# Altium PCB PCB_V1.0.PcbDoc
Units mil, origin at the board's own origin, x right, y up, seen from the top; angles counter-clockwise.
Board outline 2435.03 x 1200.03 mil, 2 copper layers (Top Layer, Bottom Layer), stack 22.441 mil thick; 48 components, 39 nets, 166 pads, 75 vias.
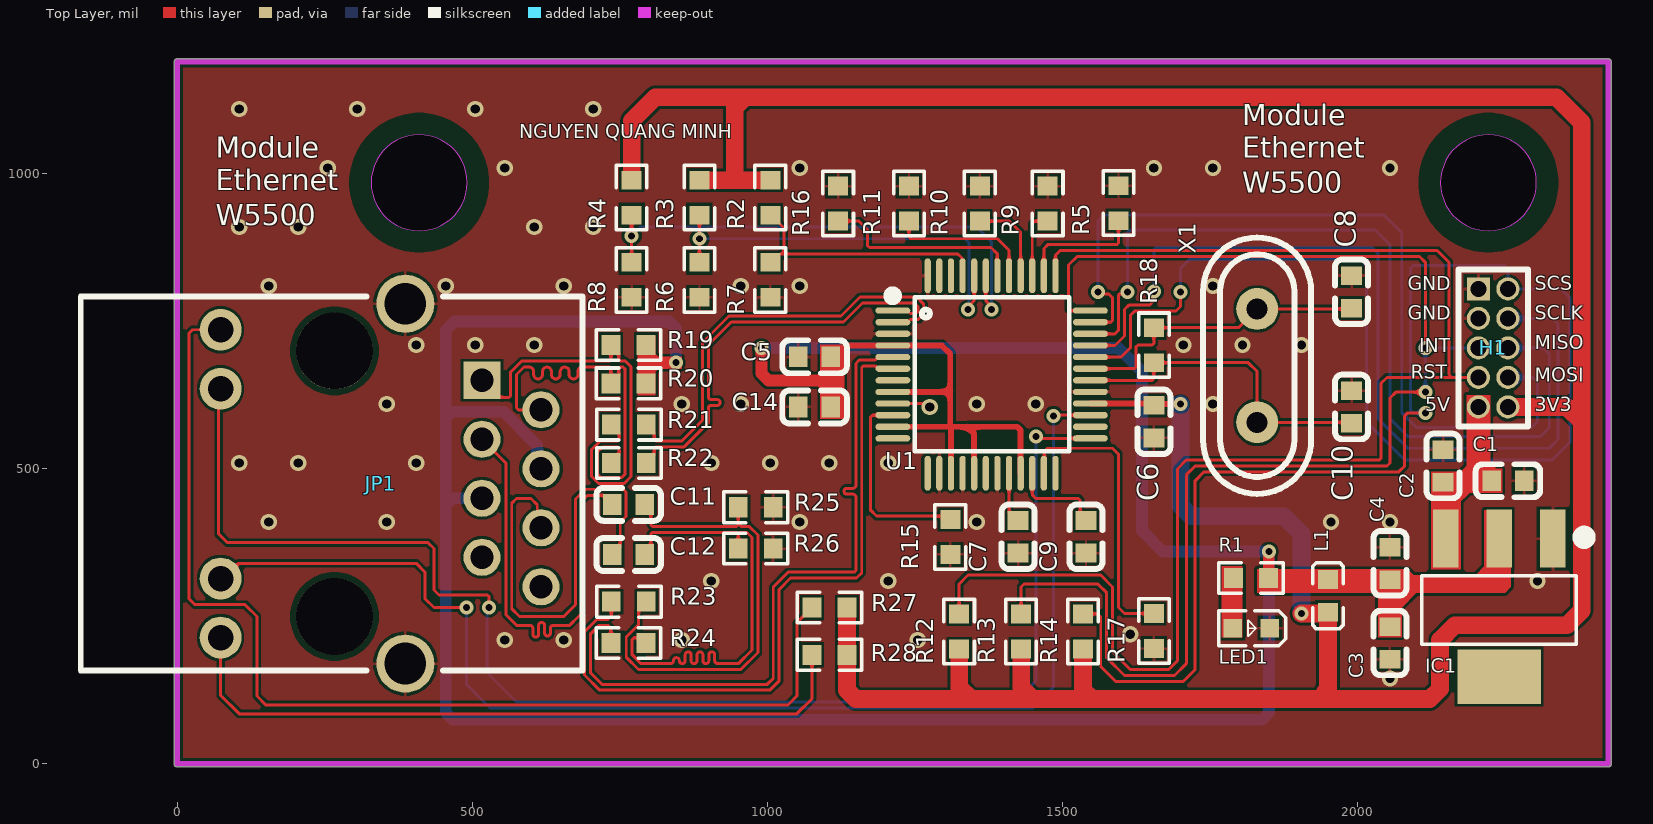
[diagram p0: Top Layer view]
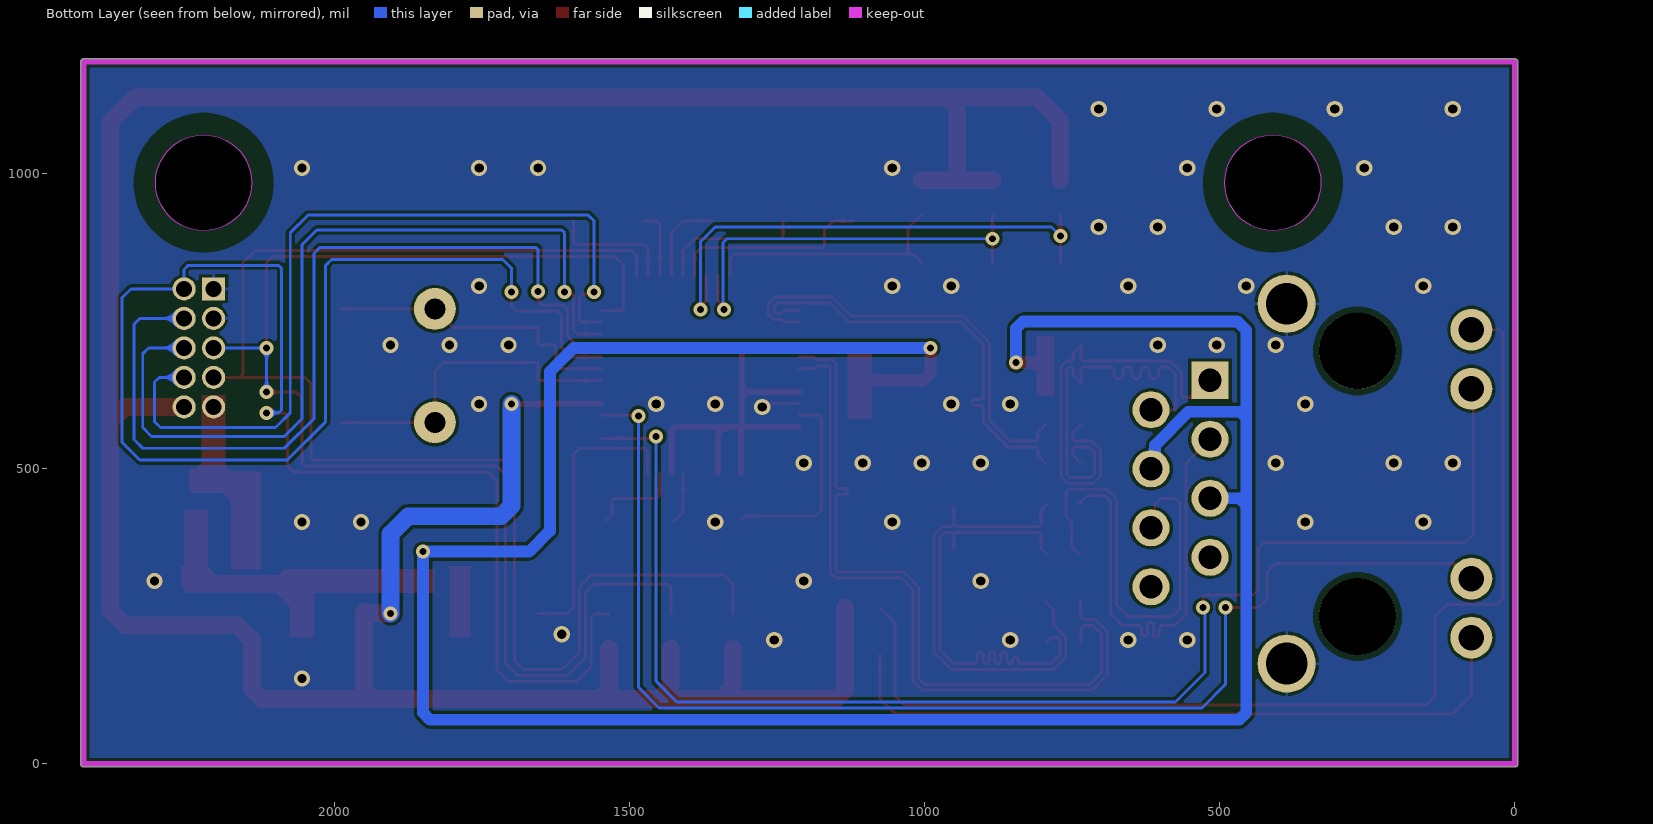
[diagram p1: Bottom Layer view, seen from below]
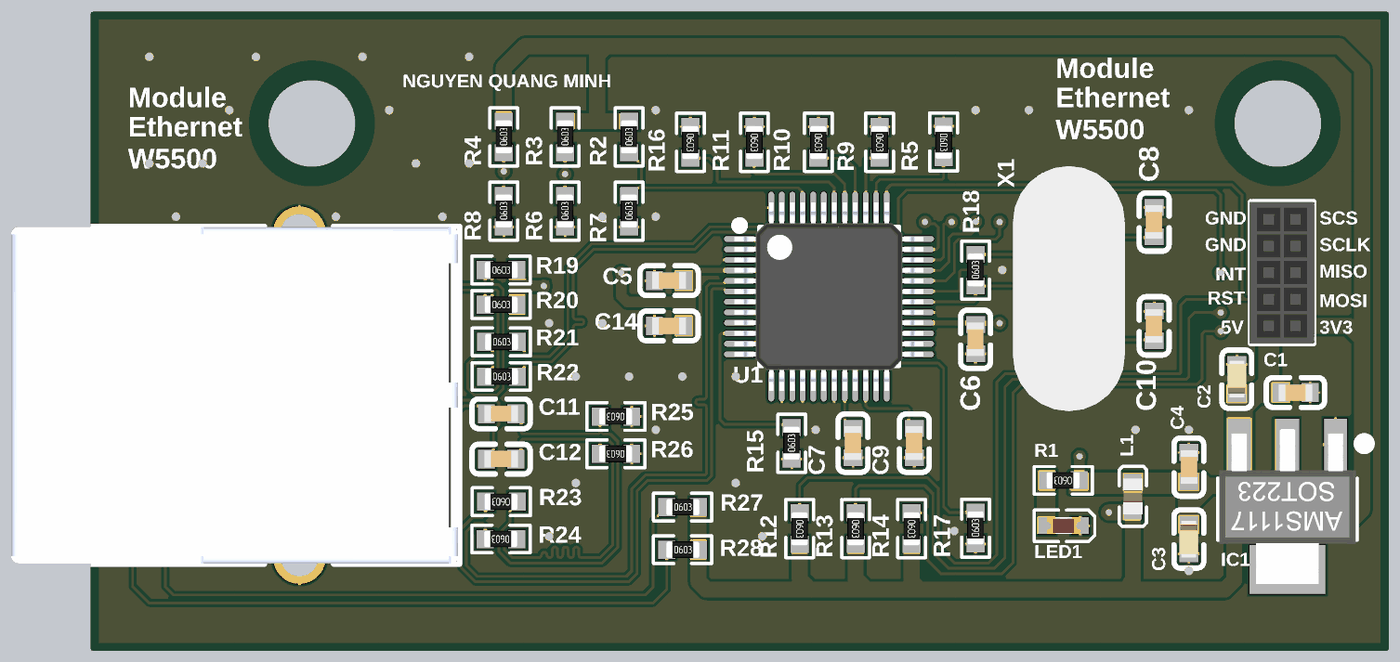
[diagram p2: 3D render of the assembled board from above, using the file's embedded part models]

## Layer stack, top to bottom
Top Solder: solder mask 0.5, Solder Resist, Dk 3.8
Top Layer: signal copper 1.378
Dielectric 1: core 19.685, FR-4, Dk 4.5
Bottom Layer: signal copper 1.378
Bottom Solder: solder mask 0.5, Solder Resist, Dk 3.8

## Board outline
-5.02,0 ccw(c0,0) 0,-5.01 2425,-5.01 ccw(c2425,0) 2430.02,0 2430.02,1190 ccw(c2425,1190) 2425,1195.01 0,1195.01 ccw(c0,1190) -5.02,1190
cut-out: 2140.5,985 ccw(c2221.89,985) 2221.89,903.61 ccw(c2221.89,985) 2303.28,985 ccw(c2221.89,985) 2221.89,1066.39 ccw(c2221.89,985)
cut-out: 328.61,985 ccw(c410,985) 410,903.61 ccw(c410,985) 491.39,985 ccw(c410,985) 410,1066.39 ccw(c410,985)

## Design rules (kind name [scope] priority, off if disabled: settings)
BoardOutlineClearance [All] p1: gap=7.87 ignorepadtopadclearanceinfootprint=FALSE
Clearance [All] p1: gap=5 ignorepadtopadclearanceinfootprint=FALSE except(9.84: Arc-Hole Track-Hole SMDPad-Hole THPad-Hole Via-Hole Fill-Hole Poly-Hole Region-Hole Text-Hole)
ComponentClearance [All] p1: gap=5 collisioncheckmode=3 verticalgap=5 showdistances=TRUE
DiffPairsRouting [All] p1: maxlimit=10 minlimit=5 mostfreqgap=5 toplayer_minwidth=5 toplayer_maxwidth=1000 toplayer_prefwidth=5 bottomlayer_minwidth=5 bottomlayer_maxwidth=1000 bottomlayer_prefwidth=5 maxuncoupledlength=500
Height [All] p1: minheight=0 maxheight=71497.94 prefheight=500
HoleSize [All] p1: absolutevalues=TRUE maxlimit=248.03 minlimit=11.81 maxpercent=80.000 minpercent=20.000
HoleToHoleClearance [All] p1: gap=9.84 allowstackedmicrovias=FALSE
MinimumAnnularRing [All] p1: minimumring=3
MinimumSolderMaskSliver [All] p1: minsoldermaskwidth=0
PlaneClearance [All] p1: clearance=5
PlaneConnect PlaneConnectPowerPads [InPadClass('PowerPads')] p1: planeconnectstyle=Direct reliefexpansion=20 reliefentries=4 reliefconductorwidth=10 reliefairgap=10
PlaneConnect [All] p2: pad.planeconnectstyle=Relief pad.reliefexpansion=11.81 pad.reliefentries=4 pad.reliefconductorwidth=5 pad.reliefairgap=5 via.planeconnectstyle=Direct via.reliefexpansion=11.81 via.reliefentries=4 via.reliefconductorwidth=5 via.reliefairgap=5
PolygonConnect PolygonConnectPowerPads [All vs (InPadClass('PowerPads'))] p1: connectstyle=Direct reliefconductorwidth=10 reliefentries=4 polygonreliefangle="90 Angle" airgapwidth=10
PolygonConnect [All] p2: thpad.connectstyle=Relief thpad.reliefconductorwidth=5 thpad.reliefentries=4 thpad.polygonreliefangle="90 Angle" thpad.airgapwidth=5 smdpad.connectstyle=Relief smdpad.reliefconductorwidth=5 smdpad.reliefentries=4 smdpad.polygonreliefangle="90 Angle" smdpad.airgapwidth=5 via.connectstyle=Direct via.reliefconductorwidth=5 via.reliefentries=4 via.polygonreliefangle="90 Angle" via.airgapwidth=5
RoutingVias [All] p1: holewidth=11.81 width=23.62 viastyle="Through Hole" minholewidth=11.81 minwidth=23.62 maxholewidth=23.62 maxwidth=259.84
SilkToSilkClearance [All] p1: silktosilkclearance=0
SilkToSolderMaskClearance [IsPad] p1: minsilkscreentomaskgap=5 clearancetoexposedcopper=TRUE
SolderMaskExpansion [All] p1: expansion=2.95 istentingtop=FALSE
Width [All] p1: maxlimit=1000 minlimit=5 preferedwidth=5 minimp=50.000000 maximp=50.000000 favimp=50.000000
20 further rules are at their usual default settings.

## Classes and differential pairs
component class VOLTAGE_RESOURCE: C1 C2 C3 C4 C5 C6 IC1 L1 LED1 R1
component class PERIPHERALS: C11 C12 H1 JP1 R19 R20 R21 R22 R23 R24 R25 R26 R27 R28
component class IC: C7 C8 C9 C10 C14 R2 R3 R4 R5 R6 R7 R8 R9 R10 R11 R12 R13 R14 R15 R16 R17 R18 U1 X1
differential pair TD: +TD_P -TD_N
differential pair RD: +RD_P -RD_N
differential pair TX: +TX_P -TX_N
differential pair RX: +RX_P -RX_N

## Components (designator, comment, footprint, x,y, rotation, side; value= is the part's Value field where it differs from the comment)
C1 "100nF" C0603 2255,480 r180 top
C2 "10uF" "C0603 - TANTA" 2145,505 r90 top
C3 "10uF" "C0603 - TANTA" 2055,205 r270 top
C4 "100nF" C0603 2055,340 r270 top
C5 "10pF" C0603 1080,690 r0 top
C6 "10pF" C0603 1655,580 r90 top
C7 "4.7uF" C0603 1425,385 r90 top
C8 "18pF" C0603 1990,800 r90 top
C9 "100nF" C0603 1540,385 r90 top
C10 "18pF" C0603 1990,605 r90 top
C11 "6.8nF" C0603 765,440 r0 top
C12 "6.8nF" C0603 765,355 r0 top
C14 "100nF" C0603 1080,605 r180 top
H1 "2x5P_1.27mm_Female_Header" "2x5P, 1.27mm, Female Header" 2230,705 r270 top
IC1 "AMS1117-3.3" SOT-223 2240,265 r180 top
JP1 "HR911105A, Through Hole" HR911105A 345,475 r270 top
L1 "1uH 330mA" L_0603 1950,285 r270 top
LED1 "Red" LED0603_RED 1820,230 r0 top
R1 "330Ω" R0603 1874.19,341.01 r180 top
R2 "10kΩ" R0603 1031.01,905.12 r90 top
R3 "10kΩ" R0603 911.01,905.12 r90 top
R4 "10kΩ" R0603 796.01,905.12 r90 top
R5 "4.7kΩ" R0603 1568.99,1004.88 r270 top
R6 "10kΩ" R0603 911.01,765.81 r90 top
R7 "10kΩ" R0603 1031.01,765.81 r90 top
R8 "10kΩ" R0603 796.01,765.81 r90 top
R9 "4.7kΩ" R0603 1448.99,1004.19 r270 top
R10 "4.7kΩ" R0603 1333.99,1004.19 r270 top
R11 "4.7kΩ" R0603 1213.99,1004.19 r270 top
R12 "4.7kΩ" R0603 1298.99,279.19 r270 top
R13 "4.7kΩ" R0603 1403.99,279.19 r270 top
R14 "4.7kΩ" R0603 1508.99,279.19 r270 top
R15 "12.4kΩ" R0603 1336.01,330.12 r90 top
R16 "4.7kΩ" R0603 1093.99,1004.19 r270 top
R17 "10kΩ" R0603 1681.01,170.81 r90 top
R18 "1MΩ" R0603 1681.01,655.12 r90 top
R19 "49.9kΩ" R0603 710.12,683.99 r0 top
R20 "49.9kΩ" R0603 710.12,618.99 r0 top
R21 "3.3Ω" R0603 710.81,548.99 r0 top
R22 "3.3Ω" R0603 710.81,483.99 r0 top
R23 "3.3Ω" R0603 819.88,301.01 r180 top
R24 "3.3Ω" R0603 819.19,231.01 r180 top
R25 "49.9kΩ" R0603 1034.88,461.01 r180 top
R26 "49.9kΩ" R0603 1034.88,391.01 r180 top
R27 "330Ω" R0603 1050.81,238.99 r0 top
R28 "330Ω" R0603 1050.81,158.99 r0 top
U1 "W5500_48LQFP" "48LQFP (7*7)" 1380,660 r270 top
X1 "25MHz" HC-49S 1830,675 r90 top

## Footprints (in the part's own frame and the unit in brackets; to place one, negate y for a bottom-side part, rotate by r counter-clockwise, add the part's x,y. Pads: shape width x height; smd on the part's side, far side on the other; paste and mask are expansions set on the pad)
"2x5P, 1.27mm, Female Header" [mm]
  rect 1x1 hole 0.7 paste-2539.97 mask+0.051: 1(-2.54,-0.635)
  round 1 hole 0.7 paste-2539.97 mask+0.051: 2(-2.54,0.635) 3(-1.27,-0.635) 4(-1.27,0.635) 5(0,-0.635) 6(0,0.635) 7(1.27,-0.635) 8(1.27,0.635) 9(2.54,-0.635) 10(2.54,0.635)
  silkscreen extent -3.38,-1.5 3.38,1.5, body extent -3.37,-1.55 3.37,1.55, height 4.5
"48LQFP (7*7)" [mm]
  oval 0.27x1.5 smd paste+0 mask+0.05: 1(-2.75,-4.25) 2(-2.25,-4.25) 3(-1.75,-4.25) 4(-1.25,-4.25) 5(-0.75,-4.25) 6(-0.25,-4.25) 7(0.25,-4.25) 8(0.75,-4.25) 9(1.25,-4.25) 10(1.75,-4.25) 11(2.25,-4.25) 12(2.75,-4.25) 25(2.75,4.25) 26(2.25,4.25) 27(1.75,4.25) 28(1.25,4.25) 29(0.75,4.25) 30(0.25,4.25) 31(-0.25,4.25) 32(-0.75,4.25) 33(-1.25,4.25) 34(-1.75,4.25) 35(-2.25,4.25) 36(-2.75,4.25)
  oval 1.5x0.27 smd paste+0 mask+0.05: 13(4.25,-2.75) 14(4.25,-2.25) 15(4.25,-1.75) 16(4.25,-1.25) 17(4.25,-0.75) 18(4.25,-0.25) 19(4.25,0.25) 20(4.25,0.75) 21(4.25,1.25) 22(4.25,1.75) 23(4.25,2.25) 24(4.25,2.75) 37(-4.25,2.75) 38(-4.25,2.25) 39(-4.25,1.75) 40(-4.25,1.25) 41(-4.25,0.75) 42(-4.25,0.25) 43(-4.25,-0.25) 44(-4.25,-0.75) 45(-4.25,-1.25) 46(-4.25,-1.75) 47(-4.25,-2.25) 48(-4.25,-2.75)
  silkscreen extent -3.59,-4.46 3.3,3.34, body extent -4.5,-4.5 4.5,4.5, height 1.6
C0603 [mm]
  rect 0.8x0.9 smd paste+0 mask+0.051: 1(-0.7,0) 2(0.7,0)
  silkscreen extent -1.39,-0.71 1.39,0.71, body extent -0.8,-0.39 0.8,0.41, height 0.8
"C0603 - TANTA" [mm]
  rect 0.8x0.9 smd paste+0 mask+0.051: 1(-0.7,0) 2(0.7,0)
  silkscreen extent -1.39,-0.71 1.39,0.71, body extent -0.88,-0.44 0.88,0.44, height 0.94
HC-49S [mm]
  round 1.8 hole 0.9 paste+0 mask+0.051: 1(-2.44,0) 2(2.44,0)
  silkscreen extent -5.52,-2.32 5.52,2.33, body extent -5.83,-2.67 5.83,2.67, height 3.99
HR911105A [mm] "CONN MOD JACK RJ45 TH"
  rect 1.6x1.6 hole 1 paste-2539.97 mask+0.051: 1(-4.45,4.355)
  round 1.6 hole 1 paste-2539.97 mask+0.051: 2(-3.18,6.895) 3(-1.91,4.355) 4(-0.64,6.895) 5(0.63,4.355) 6(1.9,6.895) 7(3.17,4.355) 8(4.44,6.895)
  round 1.8 hole 1.1 paste-2539.97 mask+0.051: 9(-6.625,-6.895) 10(-4.085,-6.895) 11(4.085,-6.895) 12(6.625,-6.895)
  round 2.5 hole 1.8 paste-2539.97 mask+0.051: SH1(-7.745,1.055) SH2(7.745,1.055)
  round 3.3 hole 3.3 unplated paste-2539.97: ""(-5.715,-1.995) ""(5.715,-1.995)
  silkscreen extent -8.05,-12.91 8.05,8.68, body extent -8.02,-12.68 8.02,8.62, height 13.5
L_0603 [mm]
  rect 0.8x0.864 smd mask+0.051: 1(-0.7,0) 2(0.7,0)
  silkscreen extent -1.42,-0.65 1.42,0.65, body extent -0.85,-0.46 0.85,0.46, height 0.71
LED0603_RED [mm]
  rect 0.8x0.8 smd paste+0 mask+0.051: 1(-0.799,0) 2(0.799,0)
  silkscreen extent -1.39,-0.76 1.49,0.75, body extent -0.8,-0.4 0.8,0.4, height 0.6
R0603 [mil]
  rect 31.75x34.02 smd paste+0 mask+2: 1(24.88,26.01) 2(84.19,26.01)
  silkscreen extent 0,0 109,52, body extent 24,10 86,42, height 18
SOT-223 [mm]
  rect 1.1x2.5 smd paste+0 mask+0.051: 1(-2.3,-2.97) 2(0,-2.97) 3(2.3,-2.97)
  rect 3.6x2.34 smd paste+0 mask+0.051: 4(0,2.97)
  silkscreen extent -3.91,-3.28 3.33,1.57, body extent -3.25,-3.71 3.25,3.66, height 2

## Part data
C1 C4 C9 C14: library part C0603_MLCC_100nF_X7R_50V, "50V 100nF X7R ±10% 0603 Multilayer Ceramic Capacitors MLCC - SMD/SMT ROHS", LCSC Part=C14663, Manufacturer=YAGEO, Mfr. Part=CC0603KRX7R9BB104, Package=0603, Temperature Coefficient="X7R, 50V", Tolerance=±10%, Voltage Rating=50V, Capacitance=100nF, Link=https://www.lcsc.com/product-detail/C14663.html
C2 C3: library part C0603_TANTA_10uF_6.3V, "10uF ±20% 6.3V Tantalum Capacitors 10Ω@100kHz 0603", Equivalent Series Resistance(ESR)=10H@100kHz, LCSC Part=C1953982, Manufacturer=VISHAY, Mfr. Part=TMCJ0J106MTRF, Operating Temperature=-55℃~+125℃, Package=0603, Tolerance=±20%, Voltage Rating=6.3V, Capacitance=10uF, Link=https://www.lcsc.com/product-detail/C1953982.html
C5 C6: library part C0603_MLCC_10pF_NP0_50V, "50V 10pF NP0 ±5% 0603 Multilayer Ceramic Capacitors MLCC - SMD/SMT ROHS", LCSC Part=C106245, Manufacturer=YAGEO, Mfr. Part=CC0603JRNPO9BN100, Package=0603, Temperature Coefficient="NP0, 50V", Tolerance=±5%, Voltage Rating=50V, Capacitance=10pF, Link=https://www.lcsc.com/product-detail/C106245.html
C7: library part C0603_MLCC_4.7uF_X5R_16V, "4.7uF ±10% 16V Ceramic Capacitor X5R 0603", LCSC Part=C19666, Manufacturer="Samsung Electro-Mechanics", Mfr. Part=CL10A475KO8NNNC, Package=0603, Temperature Coefficient="X5R, 16V", Tolerance=±10%, Voltage Rating=16V, Capacitance=4.7uF, Link=https://www.lcsc.com/product-detail/C19666.html
C8 C10: library part C0603_MLCC_18pF_NP0_50V, "18pF ±5% 50V Ceramic Capacitor NP0 0603", LCSC Part=C107040, Manufacturer=YAGEO, Mfr. Part=CC0603JRNPO9BN180, Package=0603, Temperature Coefficient="NP0, 50V", Tolerance=±5%, Voltage Rating=50V, Capacitance=18pF, Link=https://www.lcsc.com/product-detail/C107040.html
C11 C12: library part C0603_MLCC_6.8nF_X7R_50V, "6.8nF ±10% 50V Ceramic Capacitor X7R 0603", LCSC Part=C107097, Manufacturer=YAGEO, Mfr. Part=CC0603KRX7R9BB682, Package=0603, Temperature Coefficient="X7R, 50V", Tolerance=±10%, Voltage Rating=50V, Capacitance=6.8nF, Link=https://www.lcsc.com/product-detail/C107097.html
H1: "Female Header 10 Position 1.27mm Pitch Dual Row Through Hole -40℃~+105℃", LCSC Part=C7499360, Manufacturer=Megastar, Mfr. Part=ZX-PM1.27-2-5PU, Package="Through Hole,P=1.27mm", Holes Structure=2x5P, Key Attributes="CONN SOCKET 10POS 1.27mm DUAL ROW TH", Link=https://www.lcsc.com/product-detail/C7499360.html
IC1: library part AMS1117-3.3_SOT-223, "72dB@(120Hz) 1A Fixed 3.3V Positive 16V SOT-223 Voltage Regulators - Linear, Low Drop Out (LDO) Regulators ROHS", LCSC Part=C6186, Manufacturer="Advanced Monolithic Systems", Operating Temperature=-40℃~+125℃, Output Current=1A, Output Voltage=3.3V, Package=SOT-223, Voltage - Supply=16V, Voltage Dropout=1.1V@(800mA), Category="Power Management (PMIC)/Voltage Regulators - Linear, Low Drop Out (LDO) Regulators", Link=https://www.lcsc.com/product-detail/C6186.html?s_z=n_AMS1117-3.3, Mfr. Part=AMS1117-3.3, Number of Outputs=1, Output Configuration=Positive
JP1: library part HR911105A, "CONN MOD JACK RJ45 TH", LCSC Part=C12074, Manufacturer="HANRUN(Zhongshan HanRun Elec)", Package="Through Hole", Link=https://www.lcsc.com/product-detail/C12074.html, Mfr. Part=HR911105A
L1: library part L_1uH_0603_330mA, "330mA 1uH ±10% 810mΩ Wire-wound chip inductor 0603 Fixed Inductors RoHS", Current=330mA, Inductor=1uH, LCSC Part=C6364703, Manufacture Part Number=AHW1608F-1R0KTF, Manufacturer=APV, Package=0603, Link=https://www.lcsc.com/product-detail/C6364703.html
LED1: library part LED0603_Red, "20mA 230mcd Water Clear -40℃~+85℃ 630nm Red 120° 75mW 1.95V 0603 LED Indication - Discrete ROHS", Forward Current=20mA, LCSC Part=C5875723, Manufacturer=Kingbright, Mfr. Part=APT1608SURCK, Operating Temperature=-40℃~+85℃, Package=0603, Power(Watts)=75mW, Voltage - Forward(Vf)=1.95V, Illumination Color=Red, Key Attributes="1.6 x 0.8 mm SMD Chip LED Lamp", Link=https://www.lcsc.com/product-detail/C5875723.html
R1 R27 R28: library part R0603_330Ω_±1%, "100mW Thick Film Resistor 75V ±100ppm/℃ ±1% 330Ω 0603 Chip Resistor - Surface Mount ROHS", LCSC Part=C105881, Manufacturer=YAGEO, Mfr. Part=RC0603FR-07330RL, Operating Temperature=-55℃~+155℃, Package=0603, Tolerance=±1%, Link=https://www.lcsc.com/product-detail/C105881.html, Resistance=330Ω
R2 R3 R4 R6 R7 R8 R17: library part R0603_10kΩ_±1%, "100mW Thick Film Resistor 75V ±100ppm/℃ ±1% 10kΩ 0603 Chip Resistor - Surface Mount ROHS", LCSC Part=C98220, Manufacturer=YAGEO, Mfr. Part=RC0603FR-0710KL, Operating Temperature=-55℃~+155℃, Package=0603, Tolerance=±1%, Link=https://www.lcsc.com/product-detail/C98220.html, Resistance=10kΩ
R5 R9 R10 R11 R12 R13 R14 R16: library part R0603_4.7kΩ_±1%, "100mW Thick Film Resistor 75V ±100ppm/℃ ±1% 4.7kΩ 0603 Chip Resistor - Surface Mount ROHS", LCSC Part=C99782, Manufacturer=YAGEO, Mfr. Part=RC0603FR-074K7L, Operating Temperature=-55℃~+155℃, Package=0603, Tolerance=±1%, Link=https://www.lcsc.com/product-detail/C99782.html, Resistance=4.7kΩ
R15: library part R0603_12.4kΩ_±1%, "100mW 12.4kΩ 75V Thick Film Resistor ±100ppm/℃ ±1% 0603 Chip Resistor - Surface Mount RoHS", LCSC Part=C137798, Manufacturer=YAGEO, Mfr. Part=RC0603FR-0712K4L, Operating Temperature=-55℃~+155℃, Package=0603, Tolerance=±1%, Link=https://www.lcsc.com/product-detail/C137798.html, Resistance=12.4kΩ
R18: library part R0603_1MΩ_±1%, "100mW Thick Film Resistor 75V ±100ppm/℃ ±1% 1MΩ 0603 Chip Resistor - Surface Mount ROHS", LCSC Part=C105578, Manufacturer=YAGEO, Mfr. Part=RC0603FR-071ML, Operating Temperature=-55℃~+155℃, Package=0603, Tolerance=±1%, Link=https://www.lcsc.com/product-detail/C105578.html, Resistance=1MΩ
R19 R20 R25 R26: library part R0603_49.9KΩ_±1%, "100mW Thick Film Resistor 75V ±100ppm/℃ ±1% 49.9kΩ 0603 Chip Resistor - Surface Mount ROHS", LCSC Part=C114624, Manufacturer=YAGEO, Mfr. Part=RC0603FR-0749K9L, Operating Temperature=-55℃~+155℃, Package=0603, Tolerance=±1%, Link=https://www.lcsc.com/product-detail/C114624.html?s_z=n_C114624, Resistance=49.9kΩ
R21 R22 R23 R24: library part R0603_3.3Ω_±1%, "3.3Ω ±1% 100mW 0603 Thick Film Resistor", LCSC Part=C22979, Manufacturer=UNI-ROYAL, Mfr. Part=0603WAF330KT5E, Operating Temperature=-55℃~+155℃, Package=0603, Tolerance=±1%, Voltage Rating=75V, Link=https://www.lcsc.com/product-detail/C22979.html, Resistance=3.3Ω
U1: "LQFP-48(7x7) Interface Controllers RoHS", LCSC Part=C32843, Manufacturer="WIZNETTHE TICKET", Mfr. Part=TPS61175PWPR, Operating Temperature=-40℃~+85℃, Package=LQFP-48(7x7), Voltage - Supply=3.3V, Ethernet Speed Standards="10BASE-T; 100BASE-TX", Link=https://www.lcsc.com/product-detail/C32843.html?s_z=n_w5500%252048lqfp, MAC Interface=SPI, Memory Space=32KB, Number of Channels=8, Protocol=SPI
X1: library part Crystal_25Mhz_HC49S, "Crystal 25MHz ±20ppm 20pF HC-49S", Frequency Stability=±30ppm, LCSC Part=C14730, Load Capacitance=20pF, Manufacturer="YXC Crystal Oscillators", Mfr. Part=X49SD25MSD2SC, Operating Temperature=-20℃~+70℃, Package=HC-49S, Frequency=25MHz, Link=https://www.lcsc.com/product-detail/C14730.html, Type="Through Hole Crystal Oscillator"

## Via types
v1: diameter 27.56, hole 15.75, Top Layer to Bottom Layer, tented both sides, 55 vias
v2: diameter 23.62, hole 11.81, Top Layer to Bottom Layer, tented both sides, 20 vias

## Nets (pads, with @x,y where several pads share a name; then routed paths per layer and width w, separated by ;. In a path a pad name is that pad's centre, name@x,y a point inside that pad or via, vN(x,y) a via of type N, cw(c..) or ccw(c..) an arc to the next point about the centre after c; other vN are vias at no path point)
ACTn: JP1.11 U1.27 | length 2163.4
  Top Layer w5: JP1.11 78.46,314.17 104.29,340 405,340 420,325 420,280 435,265 v2(490,265) ; v2(1485,590) 1486.1,591.1 U1.27
  Bottom Layer w5: v2(490,265) 490,135 530,95 1450,95 1485,130 v2(1485,590)
GND: C1.1 C2.2 C3.2 C4.1 C5.1 C6.1 C7.1 C8.2 C9.1 C10.2 C14.2 H1.1 H1.3 IC1.1 JP1.SH1 JP1.SH2 LED1.2 R5.1 R6.1 R7.1 R8.1 R9.1 R10.1 R11.1 R15.1 R16.1 R17.1 R25.1 R26.1 U1.3 U1.9 U1.14 U1.16 U1.19 U1.29 U1.48 | length 64.7
  Top Layer w5: U1.9 1263.1,610.79 1268.9,605 v1(1275,605)
  other v1: 2055,145 555,210 655,210 855,210 1255,210 1615,220 905,310 1205,310 2305,310 155,410 355,410 1055,410 1355,410 1955,410 2055,410 105,510 205,510 405,510 905,510 1005,510 1105,510 1205,510 355,610 855,610 955,610 1355,610 1455,610 1755,610 405,710 505,710 605,710 1705,710 1805,710 1905,710 155,810 455,810 655,810 955,810 1055,810 1755,810 105,910 205,910 605,910 705,910 255,1010 555,1010 1055,1010 1655,1010 1755,1010 2055,1010 105,1110 305,1110 505,1110 705,1110
INTn: H1.5 R13.1 U1.36 | length 2349.3
  Top Layer w5: R13.1 1430,300 1435,305 1560,305 1575,290 1575,180 1605,150 1690,150 1710,170 1710,490 1725,505 2050,505 2055,510 2055,620 2065,630 v2(2115,630) ; U1.36 1513.31,768.27 1510.38,771.2 1510.38,845.38 1525,860 2105,860 2115,850 v2(2115,705)
  Bottom Layer w5: v2(2115,630) v2(2115,705) H1.5
LINKn: JP1.10 U1.25 | length 2394.9
  Top Layer w5: JP1.10 70,632.29 70,390 85,375 425,375 435,365 435,295 443.62,286.38 525.69,286.38 528.62,283.45 v2(528.62,265) ; v2(1455,555) 1458.27,551.73 U1.25
  Bottom Layer w5: v2(528.62,265) 525,261.38 525,155 575,105 1420,105 1455,140 v2(1455,555)
NetC7_2: C7.2 U1.20 | length 87.7
  Top Layer w5: U1.20 1409.53,426.06 1423.03,412.56 C7.2
NetC9_2: C9.2 U1.22 | length 160.1
  Top Layer w5: U1.22 1448.9,456.1 1455,450 1527.07,450 1530,447.07 1530,422.56 C9.2
NetC11_2: C11.2 R23.1 R25.2 | length 811.4
  Top Layer w5: C11.2 802.56,430 802.56,405.43 805.48,402.5 947.76,402.5 950.69,405.43 950.69,407.93 ; R23.1 781.62,261.62 781.62,235.8 760.93,215.11 760.93,180.74 781.68,160 955,160 984.07,189.07 984.07,387.79 969.79,402.07 956.55,402.07 950.69,407.93 ; R25.2 950.69,407.93
NetC12_2: C12.2 R24.1 R26.2 | length 811.4
  Top Layer w5: C12.2 802.56,365 802.56,389.57 805.48,392.5 947.76,392.5 950.69,389.57 ; R24.1 785.41,213.9 773.86,213.9 770.93,210.97 770.93,184.89 785.82,170 815.43,170 835.79,170 ccw(c835.79,175) 840.79,175 840.79,175.15 cw(c845.79,175.15) 850.79,175.15 850.79,175 ccw(c855.79,175) 860.79,175 860.79,185 cw(c865.79,185) 870.79,185 870.79,175 ccw(c875.79,175) 880.79,175 880.79,185 cw(c885.79,185) 890.79,185 890.79,175 ccw(c895.79,175) 900.79,175 900.79,185 cw(c905.79,185) 910.79,185 910.79,175 ccw(c915.79,175) 915.79,170 928.3,170 950.86,170 974.07,193.21 974.07,383.65 965.64,392.07 953.19,392.07 950.69,389.57 ; R26.2 950.69,389.57
NetJP1_9: JP1.9 R27.1 | length 1856.5
  Top Layer w5: JP1.9 25.83,735.83 20,730 20,280 30,270 115,270 135,250 135,115 150,100 1035,100 1050,115 1050,239.31 R27.1
NetJP1_12: JP1.12 R28.1 | length 1197.8
  Top Layer w5: JP1.12 73.54,116.46 105,85 1050,85 1075.69,110.69 R28.1
NetLED1_1: LED1.1 R1.2
NetR15_2: R15.2 U1.10 | length 338.3
  Top Layer w5: U1.10 1178.09,591.1 1175.16,588.17 1175.16,429.84 1185,420 1304.31,420 R15.2
NetR17_2: R17.2 U1.23 | length 493.3
  Top Layer w5: U1.23 1469.65,493.75 1469.65,529.65 1475,535 1585,535 1595,525 1595,265 1605,255 R17.2
PMODE_0: R2.1 R7.2 U1.45 | length 439.9
  Top Layer w5: R7.2 1018.38,863.38 1021.46,863.38 1022.44,864.35 1028.1,864.35 ; R2.1 1006.13,930 1028.1,908.04 1028.1,864.35 ; U1.45 1329.72,828.4 1329.72,857.36 1322.72,864.35 1028.1,864.35
PMODE_1: R3.1 R6.2 U1.44 | length 714.9
  Top Layer w5: R6.2 v2(885,890) R3.1 ; v2(1340,770) 1340,775.04 1350.47,785.51 U1.44
  Bottom Layer w5: v2(885,890) 1335,890 1341.38,883.62 1341.38,771.38 v2(1340,770)
PMODE_2: R4.1 R8.2 U1.43 | length 883
  Top Layer w5: R8.2 v2(770,895) R4.1 ; U1.43 1370.16,784.88 1380,775.04 v2(1380,770)
  Bottom Layer w5: v2(770,895) 785,910 1355,910 1380,885 v2(1380,770)
RD_N: C12.1 JP1.6 | length 782.3
  Top Layer w5: JP1.6 610.09,406.56 610.09,439.19 599.28,450 575,450 566.85,441.85 566.85,263.15 580,250 655,250 675,270 675,449.14 680.86,455 685.49,459.63 691.35,465.49 756.02,465.49 760.69,460.82 760.69,419.18 750.69,409.18 750.69,368.25 C12.1
RD_P: C11.1 JP1.3 | length 780.5
  Top Layer w5: JP1.3 556.85,509.8 556.85,253.15 575,235 585,235 597.5,235 cw(c597.5,230) 602.5,230 602.5,220 ccw(c607.5,220) 612.5,220 612.5,235 cw(c617.5,235) 622.5,235 622.5,221.96 ccw(c627.5,221.96) 632.5,221.96 632.5,230 cw(c637.5,230) 637.5,235 665,235 680,250 685,255 685,445 695,455 724.2,455 737.44,441.75 C11.1
RESETn: H1.7 R12.1 U1.37 | length 2447.6
  Top Layer w5: R12.1 1325,305 1340,320 1565,320 1585,300 1585,190 1615,160 1680,160 1695,175 1695,500 1710,515 2037.07,515 2040,517.93 2040,645 2050,655 2160,655 ; U1.37 1488.27,862.07 1496.2,870 2135,870 2155,850 2155,660 2160,655 ; H1.7 2160,655
RSVD_1: R16.2 U1.42 | length 345.7
  Top Layer w5: R16.2 1155,920 1170,905 1170,877.93 1172.93,875 1379.08,875 1389.65,864.43 1389.65,827.51 U1.42
RSVD_2: R11.2 U1.41 | length 249.1
  Top Layer w5: R11.2 1240,892.93 1242.93,890 1390,890 1409.53,870.47 U1.41
RSVD_3: R10.2 U1.40 | length 150.6
  Top Layer w5: R10.2 1410,920 1429.21,900.79 U1.40
RSVD_4: R9.2 U1.39 | length 116.4
  Top Layer w5: U1.39 1448.9,915.97 1452.93,920 R9.2
RSVD_5: R5.2 U1.38 | length 214.3
  Top Layer w5: U1.38 1468.58,873.58 1475,880 1592.07,880 1595,882.93 R5.2
RX_N: R24.2 U1.5 | length 1212
  Top Layer w5: R24.2 735,230 730,235 715,235 700,220 700,155 720,135 1000,135 1010,145 1010,300 1035,325 1147.07,325 1150,327.93 1150,420 1150,452.14 ccw(c1145,452.14) 1145,457.14 1134.85,457.14 cw(c1134.85,462.14) 1134.85,467.14 1145,467.14 ccw(c1145,472.14) 1150,472.14 1150,484.64 1150,678.83 1155.86,684.68 1182.73,684.68 1187.57,689.53 U1.5
RX_P: R23.2 U1.6 | length 1212
  Top Layer w5: R23.2 735.69,250.69 730,245 710.86,245 690,224.14 690,150.86 715.86,125 1004.14,125 1020,140.86 1020,295.86 1039.14,315 1151.21,315 1160,323.79 1160,470.43 1160,671.76 1162.93,674.68 1182.73,674.68 1187.57,669.84 U1.6
SPI0-MISO: H1.6 U1.34 | length 1467.5
  Top Layer w5: U1.34 1588.9,728.9 1595,735 1595,795 1596.44,796.44 1606.44,796.44 v2(1610,800)
  Bottom Layer w5: v2(1610,800) 1610,900 1615,905 2030,905 2055,880 2055,585 2085,555 2310,555 2325,570 2325,695 2315,705 H1.6
SPI0-MOSI: H1.8 U1.35 | length 1428
  Top Layer w5: U1.35 1582.07,748.58 1585,751.51 1585,790 1578.56,796.44 1563.56,796.44 v2(1560,800)
  Bottom Layer w5: v2(1560,800) 1560,920 1570,930 2045,930 2075,900 2075,595 2100,570 2295,570 2305,580 2305,647.07 2297.07,655 H1.8
SPI0-SCLK: H1.4 U1.33 | length 1533.7
  Top Layer w5: U1.33 1589.21,709.21 1605,725 1605,770 1612.5,777.5 1647.5,777.5 1654.45,784.45 1654.45,799.74 v2(1655.47,800.75)
  Bottom Layer w5: v2(1655.47,800.75) 1655.47,872.07 1658.4,875 2025,875 2035,865 2035,585 2085,535 2325,535 2340,550 2340,745 2330,755 H1.4
SPI0-SCSn: H1.2 R14.1 U1.32 | length 3188.3
  Top Layer w5: R14.1 1559.31,254.31 1565,248.62 1565,165 1590,140 1705,140 1725,160 1725,480 1740,495 2070,495 2080,505 2080,590 2085,595 v2(2115,595) ; U1.32 1599.53,689.53 1615,705 1615,760 1622.5,767.5 1692.5,767.5 1700,775 v2(1700,800)
  Bottom Layer w5: v2(1700,800) 1700,840 1715,855 2005,855 2015,845 2015,580 2080,515 2330,515 2360,545 2360,790 2345,805 H1.2 2255,837.94 2247.94,845 2095,845 2090,840 2090,600 2095,595 v2(2115,595)
TD_N: JP1.2 R20.1 R22.1 | length 753.6
  Top Layer w5: JP1.2 577.93,600.19 575,603.12 575,660 582.74,667.74 587.5,672.5 596.49,672.5 cw(c596.49,665) 603.99,665 603.99,660 ccw(c611.49,660) 618.99,660 618.99,665 cw(c626.49,665) 633.99,665 633.99,660 ccw(c641.49,660) 648.99,660 648.99,665 cw(c656.49,665) 663.99,665 663.99,660 ccw(c671.49,660) 678.99,660 678.99,665 cw(c686.49,665) 686.49,672.5 720.07,672.5 732.07,672.5 735,669.57 R20.1 748.38,658.38 748.38,669.57 751.3,672.5 755.45,672.5 759.07,668.88 759.07,491.35 753.21,485.49 718.17,485.49 712.31,491.35 712.31,528.65 721.16,537.5 746.14,537.5 749.07,534.57 749.07,523.38 R22.1
TD_P: JP1.1 R19.1 R21.1 | length 753.1
  Top Layer w5: JP1.1 545.45,621.2 562.07,621.2 565,624.13 565,664.14 583.36,682.5 732.07,682.5 735,685.43 R19.1 748.38,696.62 748.38,685.43 751.3,682.5 759.59,682.5 769.07,673.02 769.07,487.21 757.35,475.49 714.03,475.49 702.31,487.21 702.31,532.79 717.02,547.5 746.14,547.5 749.07,550.43 749.07,561.62 R21.1
TX_N: R22.2 U1.1 | length 744.1
  Top Layer w5: R22.2 808.38,523.38 808.38,534.57 811.3,537.5 859.14,537.5 900,578.36 900,590 900,602.5 cw(c905,602.5) 905,607.5 915,607.5 ccw(c915,612.5) 915,617.5 905,617.5 cw(c905,622.5) 900,622.5 900,695 900,710 936.72,746.72 938.96,748.96 988.22,748.96 1128.96,748.96 1161.09,781.09 1248.91,781.09 1255,775 1255,766.35 1252.07,763.42 1242.64,763.42 1237.79,768.27 U1.1
TX_P: R21.2 U1.2 | length 745.8
  Top Layer w5: R21.2 808.38,561.62 808.38,550.43 811.3,547.5 855,547.5 890,582.5 890,714.14 934.82,758.96 1124.82,758.96 1156.94,791.09 1253.06,791.09 1265,779.14 1265,762.21 1256.21,753.42 1242.64,753.42 1237.79,748.58 U1.2
VCC-3V3A: C3.1 C4.2 C5.2 C14.1 IC1.2 JP1.4 JP1.5 L1.1 R1.1 R19.2 R20.2 U1.4 U1.8 U1.11 U1.15 U1.17 U1.21 | length 5429.5
  Top Layer w10: C5.2@1107.56,691.97 C5.2 1117.56,700 1125,700 1134.21,709.21 U1.4 1295.79,709.21 1310,695 1310,630.47 ; U1.11 1281.42,571.42 1285,571.42 1310,571.42 ; U1.8 1310,630.47 ; 1306.42,571.42 1310,575 1310,630.47 ; U1.15 1311.1,570.33 1310,571.42 ; U1.17 1350.47,559.53 1338.58,571.42 ; U1.21 1429.21,565.57 1423.35,571.42 1338.58,571.42 ; 1310,571.42 1338.58,571.42
  Top Layer w20: v2(990,705) 990,661.72 1001.72,650 1095.84,650 1101.81,644.03 ; C14.1 C5.2 ; R1.1 1849.65,315.35 1849.65,359.65 v2(1850,360)
  Bottom Layer w20: JP1.5@519.88,450.19 JP1.5 466.72,450.19 455,438.48 ; JP1.4 609.65,507 609.65,540.35 553.31,596.69 464.95,596.69 455,586.74 ; v2(845,680) 845,738.28 833.28,750 470,750 455,735 455,586.74 ; v2(990,705) 1595,705 1635,665 1635,395 1670,360 v2(1850,360) 1850,86.72 1838.28,75 466.72,75 455,86.72 455,438.48 ; 455,438.48 455,586.74
VCC-3V3D: C6.2 H1.10 L1.2 R2.2 R3.2 R4.2 R12.2 R13.2 R14.2 R27.2 R28.2 U1.28 | length 5647.7
  Top Layer w10: U1.28 1651.76,610.79 C6.2 1657.44,610 v2(1700,610)
  Top Layer w30: R4.2 770,1090 810,1130 962.57,1130 ; R3.2 950.69,989.31 ; R2.2 950.69,989.31 ; R27.2 1135,125 1150,110 1345,110 ; R12.2 1325,130 1345,110 ; R13.2 1430,130 1450,110 ; R14.2 1535,125 1550,110 ; v2(1905,255) 1947.56,255 L1.2 1950,116.72 ; 1945,121.72 1956.72,110 ; H1.10 2355,605 2380,580 ; 950.69,989.31 945,995 945,1112.43 962.57,1130 ; 962.57,1130 2337.14,1130 2380,1087.14 2380,580 ; 1345,110 1450,110 ; 1450,110 1550,110 ; 1550,110 1956.72,110 ; 1956.72,110 2122.43,110 2140,127.57 2140,210 2165,235 2355,235 2380,260 2380,580
  Bottom Layer w30: v2(1700,610) 1700,437.57 1717.57,420 1875,420 1905,390 v2(1905,255)
VCC-5V: C1.2 C2.1 H1.9 IC1.3
XI: C10.1 R18.1 U1.30 X1.1 | length 563.7
  Top Layer w5: U1.30 1652.07,650.16 1655,653.09 R18.1 1815,680 1830,665 X1.1 1988.51,578.94 C10.1
XO: C8.1 R18.2 U1.31 X1.2 | length 520.7
  Top Layer w5: U1.31 1622.07,669.84 1625,672.77 1625,707.07 1627.93,710 1652.07,710 1655,712.93 R18.2 1798.25,739.31 X1.2 1988.62,771.06 C8.1
pads on no net: IC1.4 JP1. JP1.7 JP1.8 U1.7 U1.12 U1.13 U1.18 U1.24 U1.26 U1.46 U1.47

## Polygon pours and split planes (outlines as drawn)
GND on Top Layer "GND_L01_P000" (solid, remove dead copper, pour order 0): 0,0 0,1190 2425,1190 2425,0
GND on Bottom Layer "GND_L02_P001" (solid, remove dead copper, pour order 1): 0,0 0,1190 2425,1190 2425,0

## Keep-outs
Keep-Out Layer:
  lines w10: 0,0 2425,0 2425,1190 0,1190 0,0

## Other copper
Top Layer:
  pour cut-out: 2103.78,985 ccw(c2221.89,985) 2221.89,866.89 ccw(c2221.89,985) 2340,985 ccw(c2221.89,985) 2221.89,1103.11 ccw(c2221.89,985)
  pour cut-out: 291.89,985 ccw(c410,985) 410,866.89 ccw(c410,985) 528.11,985 ccw(c410,985) 410,1103.11 ccw(c410,985)
  region net VCC-3V3A: 1090,585 1090,635 1085,640 1085,660 1090,665 1090,710 1130,710 1130,585
  region net VCC-3V3A: 815,690 810,695 805,695 805,660 815,670 855,670 855,690
  region net VCC-3V3A: 780,625 780,725 810,725 810,625
  region net NetLED1_1: 1805,335 1805,215 1770,215 1770,335
  region net VCC-3V3A: 1830,330 2035,330 2035,290 1830,290
  region net VCC-3V3A: 2260,335 2260,300 2250,290 2100,290 2075,265 2075,215 2035,215 2035,295 2045,305 2225,305 2255,335
  region net VCC-3V3A: 2215,430 2255,430 2255,295 2035,295 2035,330 2085,330 2095,320 2200,320 2215,335
  region net VCC-5V: 2230,460 2245,460 2245,500 2235,500 2220,515 2215,505 2210,460
  region net VCC-5V: 2190,460 2170,440 2170,470
  region net VCC-5V: 2185,625 2225,625 2225,460 2175,460 2175,330 2125,330 2125,495 2175,495 2185,505
Bottom Layer:
  pour cut-out: 2103.78,985 ccw(c2221.89,985) 2221.89,866.89 ccw(c2221.89,985) 2340,985 ccw(c2221.89,985) 2221.89,1103.11 ccw(c2221.89,985)
  pour cut-out: 291.89,985 ccw(c410,985) 410,866.89 ccw(c410,985) 528.11,985 ccw(c410,985) 410,1103.11 ccw(c410,985)

## Silkscreen, mask and mechanical layers (free items; w line width, h text height)
Top Overlay:
  text "Module" at 1805,1070.61 h60
  text "NGUYEN QUANG MINH" at 580,1052.63 h40
  text "Module" at 65,1015.61 h60
  text "Ethernet" at 1805,1015.61 h60
  text "Ethernet" at 65,960.61 h60
  text "W5500" at 1805,955.72 h60
  text "W5500" at 65,900.72 h60
  text "GND" at 2085,795.48 h40
  text "SCS" at 2300,795.48 h40
  text "GND" at 2085,745.48 h40
  text "SCLK" at 2300,745.48 h40
  text "MISO" at 2300,695.48 h40
  text "INT" at 2105,690 h40
  text "RST" at 2090,645.48 h40
  text "MOSI" at 2300,640.48 h40
  text "5V" at 2115,590.48 h40
  text "3V3" at 2300,590.48 h40